# Altium PCB PCB.PcbDoc (part 3 of 3)
Units mil, origin at the board's own origin, x right, y up, seen from the top; angles counter-clockwise.
Board outline 8690 x 2710 mil, 2 copper layers (Top Layer, Bottom Layer); 78 components, 139 nets, 435 pads, 186 vias.
Unrouted connection lines stored in the file: 1.
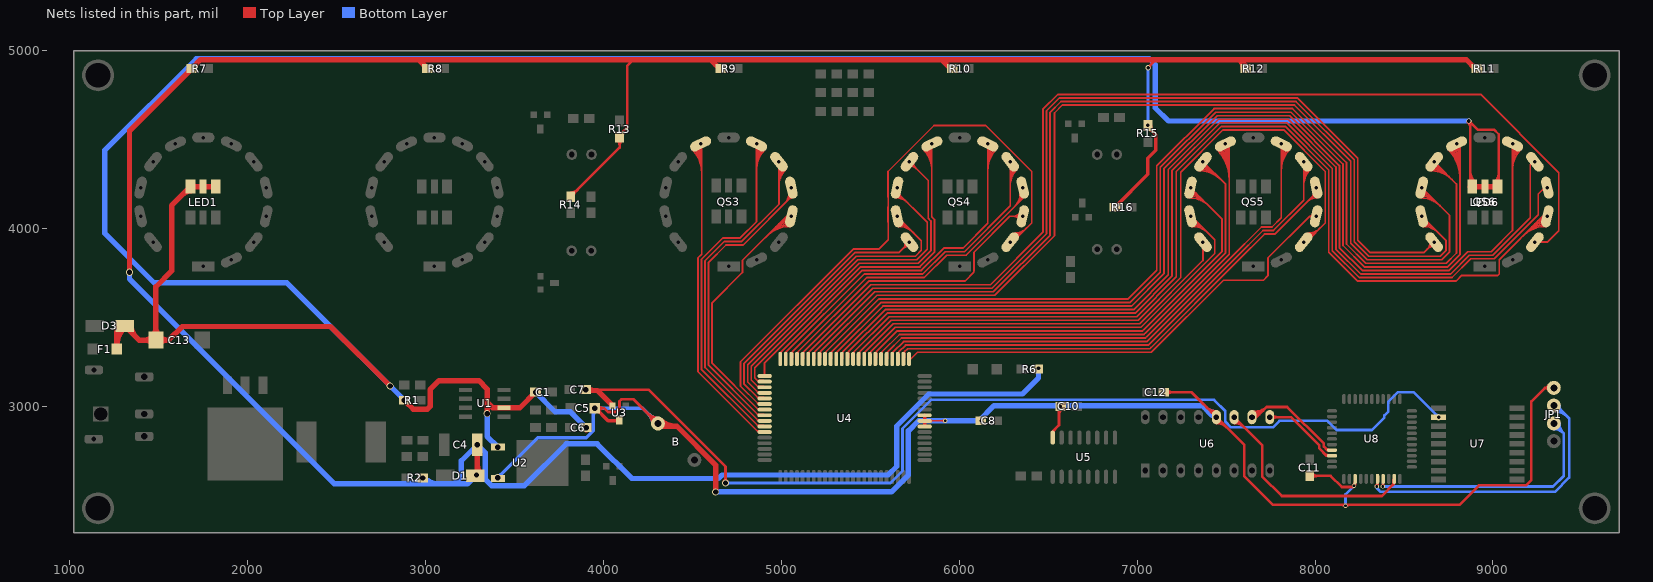
[diagram p3: the nets of this part, all layers, seen from the top]

## Via types
v1: diameter 24, hole 15, Top Layer to Bottom Layer, 111 vias
v2: diameter 40, hole 22, Top Layer to Bottom Layer, 33 vias
v3: diameter 40, hole 30, Top Layer to Bottom Layer, 28 vias
v4: diameter 30, hole 20, Top Layer to Bottom Layer, 10 vias
v5: diameter 35, hole 20, Top Layer to Bottom Layer, 3 vias
v6: diameter 40, hole 20, Top Layer to Bottom Layer, 1 vias

## Nets (pads, with @x,y where several pads share a name; then routed paths per layer and width w, separated by ;. In a path a pad name is that pad's centre, name@x,y a point inside that pad or via, vN(x,y) a via of type N, cw(c..) or ccw(c..) an arc to the next point about the centre after c; other vN are vias at no path point) (continued)
QS3-5: QS3.9 U4.75 | length 2422.7
  Top Layer w10: QS3.9@4497.73,4445.01 cw(c4368.37,4315.65) 4551.31,4315.65 ; QS3.9@4504.8,4452.08 cw(c4392.51,4339.8) 4551.31,4339.8 ; QS3.9@4511.87,4459.15 cw(c4416.65,4363.94) 4551.31,4363.94 ; QS3.9@4518.94,4466.22 cw(c4440.8,4388.08) 4551.31,4388.08 ; QS3.9@4526.01,4473.29 cw(c4464.94,4412.22) 4551.31,4412.22 ; QS3.9@4533.08,4480.37 cw(c4489.08,4436.37) 4551.31,4436.37 ; QS3.9@4540.15,4487.44 cw(c4513.22,4460.51) QS3.9@4551.31,4460.51 ; QS3.9@4545.6,4476.34 4551.31,4470.63 4551.31,3856.16 4530,3834.85 4530,3196.9 4864.97,2861.93 ; U4.75@4872.49,2861.14 cw(c4869.22,2866.17) 4864.97,2861.93 ; U4.75@4905.2,2856.26 4899.53,2861.93 4864.97,2861.93
QS3-6: QS3.7 U4.74 | length 2449.5
  Top Layer w10: 4859.91,4329.43 cw(c5023.37,4329.43) QS3.7@4907.79,4445.01 ; 4859.91,4353.57 cw(c4999.23,4353.57) QS3.7@4900.71,4452.08 ; 4859.91,4377.71 cw(c4975.08,4377.71) QS3.7@4893.64,4459.15 ; 4859.91,4401.85 cw(c4950.94,4401.85) QS3.7@4886.57,4466.22 ; 4859.91,4426 cw(c4926.8,4426) QS3.7@4879.5,4473.29 ; QS3.7@4859.91,4450.14 cw(c4902.66,4450.14) QS3.7@4872.43,4480.37 ; QS3.7@4859.91,4474.28 cw(c4878.52,4474.28) QS3.7@4865.36,4487.44 ; QS3.7@4859.91,4476.34 4859.91,4039.91 4767.95,3947.95 4671.38,3947.95 4550,3826.57 4550,3208.4 4864.97,2893.43 ; U4.74@4872.49,2892.64 cw(c4869.22,2897.67) 4864.97,2893.43 ; U4.74@4905.2,2887.76 4899.53,2893.43 4864.97,2893.43
QS3-7: QS3.6 U4.73 | length 2147
  Top Layer w10: U4.73@4872.49,2924.14 cw(c4869.22,2929.16) 4864.97,2924.92 ; U4.73@4905.2,2919.25 4899.53,2924.92 4864.97,2924.92 ; 4985.94,4240.33 cw(c5115.83,4240.33) QS3.6@5023.98,4332.18 ; 4985.94,4264.47 cw(c5091.69,4264.47) QS3.6@5016.91,4339.25 ; 4985.94,4288.62 cw(c5067.54,4288.62) QS3.6@5009.84,4346.32 ; 4985.94,4312.76 cw(c5043.4,4312.76) QS3.6@5002.77,4353.39 ; QS3.6@4985.94,4375.83 4985.94,4137.65 4776.23,3927.95 4679.66,3927.95 4570,3818.28 4570,3219.89 4864.97,2924.92
QS3-8: QS3.5 U4.72 | length 1826.2
  Top Layer w10: U4.72@4872.49,2955.63 cw(c4869.22,2960.66) 4864.97,2956.42 ; U4.72@4905.2,2950.75 4899.53,2956.42 4864.97,2956.42 ; 5018.99,4142.42 ccw(c4965.36,4196.05) QS3.5@5041.2,4196.05 ; 5036.06,4159.49 ccw(c4999.5,4196.05) QS3.5@5051.2,4196.05 ; 5040.38,4163.81 cw(c5063.76,4140.42) QS3.5@5063.76,4173.49 ; QS3.5@5055.88,4230.6 5070,4216.48 5070,4193.43 4784.52,3907.95 4687.95,3907.95 4590,3810 4590,3231.39 4864.97,2956.42
QS3-9: QS3.4 U4.71 | length 2056.6
  Top Layer w10: U4.71@4872.49,2987.13 cw(c4869.22,2992.16) 4864.97,2987.91 ; U4.71@4905.2,2982.24 4899.53,2987.91 4864.97,2987.91 ; 4917.3,3958.16 cw(c5047.99,3827.46) QS3.4@5047.99,4012.3 ; 4934.37,3975.23 cw(c5047.99,3861.6) QS3.4@5047.99,4022.3 ; 4951.44,3992.3 cw(c5047.99,3895.75) QS3.4@5047.99,4032.3 ; 4968.51,4009.37 cw(c5047.99,3929.89) QS3.4@5047.99,4042.3 ; 4985.58,4026.45 cw(c5047.99,3964.03) QS3.4@5047.99,4052.3 ; 5002.65,4043.52 cw(c5047.99,3998.17) QS3.4@5047.99,4062.3 ; 5019.72,4060.59 cw(c5047.99,4032.31) QS3.4@5047.99,4072.3 ; QS3.4@5055.88,4069.4 5028.54,4069.4 4780.75,3821.61 4780.75,3754.02 4610,3583.27 4610,3242.89 4864.97,2987.91
QS4-0: QS4.3 U4.70 | length 3480.7
  Top Layer w10: U4.70@4872.49,3018.62 cw(c4869.22,3023.65) 4864.97,3019.41 ; U4.70@4905.2,3013.74 4899.53,3019.41 4864.97,3019.41 ; QS4.3@6285.94,3924.17 6311.77,3950 6325.48,3950 6406.85,4031.37 6406.85,4321.34 6148.19,4580 5857.32,4580 5598.66,4321.34 5598.66,4176.8 5600,4175.46 5600,4124.54 5598.66,4123.2 5598.66,4035.38 5600,4034.04 5600,3938 5547,3885 5403.63,3885 4769.84,3251.21 4769.84,3114.54 4864.97,3019.41 ; QS4.3@6308.03,3954.43 ccw(c6308.03,4007.25) 6345.38,3969.9 ; QS4.3@6308.03,3964.43 ccw(c6308.03,4041.39) 6362.45,3986.97 ; QS4.3@6308.03,3974.43 ccw(c6308.03,4075.53) 6379.52,4004.04
QS4-1: QS4.13 U4.69 | length 1619
  Top Layer w10: U4.69@4872.49,3050.12 cw(c4869.22,3055.15) 4864.97,3050.91 ; U4.69@4905.2,3045.24 4899.53,3050.91 4864.97,3050.91 ; QS4.13@5697.01,3924.17 cw(c5642.55,3924.17) 5681.06,3885.66 cw(c5719.57,3847.15) QS4.13@5719.57,3901.61 ; QS4.13@5707.01,3924.17 cw(c5676.69,3924.17) 5698.13,3902.73 cw(c5719.57,3881.29) QS4.13@5719.57,3911.61 ; QS4.13@5719.57,3924.17 5660.4,3865 5411.91,3865 4789.84,3242.93 4789.84,3126.03 4864.97,3050.91
QS4-2: QS4.12 U4.68 | length 1976.3
  Top Layer w10: U4.68@4872.49,3081.62 cw(c4869.22,3086.65) 4864.97,3082.4 ; U4.68@4905.2,3076.73 4899.53,3082.4 4864.97,3082.4 ; QS4.12@5649.63,4069.4 5786.31,3932.73 5786.31,3877.97 5753.33,3845 5420.2,3845 4809.84,3234.64 4809.84,3137.53 4864.97,3082.4 ; QS4.12@5657.52,4012.3 cw(c5657.52,3893.47) 5741.54,3977.5 ; QS4.12@5657.52,4022.3 cw(c5657.52,3927.61) 5724.47,3994.57 ; QS4.12@5657.52,4032.3 cw(c5657.52,3961.76) 5707.4,4011.64 ; QS4.12@5657.52,4042.3 cw(c5657.52,3995.9) 5690.33,4028.71
QS4-3: QS4.11 U4.67 | length 2036.4
  Top Layer w10: U4.67@4872.49,3113.11 cw(c4869.22,3118.14) 4864.97,3113.9 ; U4.67@4905.2,3108.23 4899.53,3113.9 4864.97,3113.9 ; QS4.11@5641.75,4173.49 cw(c5641.75,4078.08) 5709.21,4145.55 ; QS4.11@5641.75,4183.49 cw(c5641.75,4112.23) 5692.14,4162.62 ; QS4.11@5641.75,4193.49 cw(c5641.75,4146.37) 5675.07,4179.69 ; QS4.11@5649.63,4230.6 5649.63,4205.13 5820,4034.76 5820,3883.38 5761.62,3825 5428.48,3825 4829.84,3226.36 4829.84,3149.03 4864.97,3113.9 ; QS4.11@5664.31,4196.05 ccw(c5677.82,4196.05) 5668.26,4186.5
QS4-4: QS4.10 U4.66 | length 2075.8
  Top Layer w10: U4.66@4872.49,3144.61 cw(c4869.22,3149.64) 4864.97,3145.39 ; U4.66@4905.2,3139.72 4899.53,3145.39 4864.97,3145.39 ; QS4.10@5719.57,4353.27 cw(c5719.57,4298.81) 5758.08,4337.32 cw(c5796.59,4375.83) QS4.10@5742.13,4375.83 ; QS4.10@5719.57,4363.27 cw(c5719.57,4332.95) 5741.01,4354.39 cw(c5762.45,4375.83) QS4.10@5732.13,4375.83 ; QS4.10@5719.57,4375.83 5824.76,4270.64 5824.76,4058.28 5840,4043.05 5840,3875.1 5769.9,3805 5436.77,3805 4849.84,3218.08 4849.84,3160.52 4864.97,3145.39
QS4-5: QS4.9 U4.65 | length 2409.3
  Top Layer w10: U4.65@4901.08,3175.34 ccw(c4891.13,3185.29) 4905.2,3185.29 ccw(c4919.26,3185.29) U4.65@4909.32,3175.34 ; U4.65@4905.2,3171.22 4905.2,3245.15 5445.05,3785 5778.18,3785 5860,3866.82 5860,4051.33 5844.76,4066.57 5844.76,4475.5 QS4.9@5845.6,4476.34 ; QS4.9@5797.73,4445.01 cw(c5684.17,4331.45) 5844.76,4331.45 ; QS4.9@5804.8,4452.08 cw(c5708.31,4355.59) 5844.76,4355.59 ; QS4.9@5811.87,4459.15 cw(c5732.45,4379.73) 5844.76,4379.73 ; QS4.9@5818.94,4466.22 cw(c5756.59,4403.88) 5844.76,4403.88 ; QS4.9@5826.01,4473.29 cw(c5780.74,4428.02) 5844.76,4428.02 ; QS4.9@5833.08,4480.37 cw(c5804.88,4452.16) QS4.9@5844.76,4452.16 ; QS4.9@5840.15,4487.44 cw(c5829.02,4476.3) QS4.9@5844.76,4476.3
QS4-6: QS4.7 U4.64 | length 2451.4
  Top Layer w10: U4.64@4992.8,3266.69 4992.8,3302.8 5455,3765 5786.47,3765 5911.82,3890.35 6020.5,3890.35 6159.91,4029.76 QS4.7@6159.91,4476.34 ; 6159.91,4329.43 cw(c6323.37,4329.43) QS4.7@6207.79,4445.01 ; 6159.91,4353.57 cw(c6299.23,4353.57) QS4.7@6200.71,4452.08 ; 6159.91,4377.71 cw(c6275.08,4377.71) QS4.7@6193.64,4459.15 ; 6159.91,4401.85 cw(c6250.94,4401.85) QS4.7@6186.57,4466.22 ; 6159.91,4426 cw(c6226.8,4426) QS4.7@6179.5,4473.29 ; QS4.7@6159.91,4450.14 cw(c6202.66,4450.14) QS4.7@6172.43,4480.37 ; QS4.7@6159.91,4474.28 cw(c6178.52,4474.28) QS4.7@6165.36,4487.44
QS4-7: QS4.6 U4.63 | length 2182.8
  Top Layer w10: U4.63@5024.29,3266.69 5024.29,3304.29 5465,3745 5794.75,3745 5920.11,3870.35 6028.79,3870.35 6285.94,4127.51 QS4.6@6285.94,4375.83 ; 6285.94,4240.33 cw(c6415.83,4240.33) QS4.6@6323.98,4332.18 ; 6285.94,4264.47 cw(c6391.69,4264.47) QS4.6@6316.91,4339.25 ; 6285.94,4288.62 cw(c6367.54,4288.62) QS4.6@6309.84,4346.32 ; 6285.94,4312.76 cw(c6343.4,4312.76) QS4.6@6302.77,4353.39
QS4-8: QS4.5 U4.62 | length 1955.4
  Top Layer w10: U4.62@5055.79,3266.69 5061.46,3272.36 5061.46,3306.92 ; U4.62@5060.67,3299.4 cw(c5065.7,3302.67) 5061.46,3306.92 ; 6311.81,4125.1 ccw(c6240.86,4196.05) QS4.5@6341.2,4196.05 ; 6328.89,4142.17 ccw(c6275,4196.05) QS4.5@6351.2,4196.05 ; 6345.96,4159.24 ccw(c6309.14,4196.05) QS4.5@6361.2,4196.05 ; QS4.5@6350.92,4177.51 cw(c6344.35,4168.03) 6355.88,4168.03 ; QS4.5@6355.88,4230.6 6355.88,4169.16 6038.68,3851.97 6038.68,3850.4 6038.64,3850.35 5928.39,3850.35 5803.04,3725 5479.54,3725 5061.46,3306.92
QS4-9: QS4.4 U4.61 | length 1828.1
  Top Layer w10: U4.61@5087.28,3266.69 5092.95,3272.36 5092.95,3306.92 ; U4.61@5092.17,3299.4 cw(c5097.2,3302.67) 5092.95,3306.92 ; QS4.4@6339.93,4053.45 ccw(c6301.42,4014.94) 6301.42,4069.4 ccw(c6301.42,4123.86) QS4.4@6339.93,4085.35 ; QS4.4@6347,4060.52 ccw(c6325.56,4039.08) 6325.56,4069.4 ccw(c6325.56,4099.72) QS4.4@6347,4078.28 ; QS4.4@6355.88,4069.4 6284.4,4069.4 6082.5,3867.5 6082.5,3760 6080.75,3758.25 6080.75,3754.02 6031.73,3705 5491.03,3705 5092.95,3306.92
QS5-0: QS5.3 U4.50 | length 4251.8
  Top Layer w10: U4.50@5433.74,3266.69 5439.41,3272.36 5439.41,3306.92 ; U4.50@5438.62,3299.4 cw(c5443.65,3302.67) 5439.41,3306.92 ; QS5.3@7949.65,3924.17 8056.85,4031.37 8056.85,4321.34 7823.43,4554.76 7482.08,4554.76 7245,4317.68 7245,3725.15 7004.85,3485 5617.49,3485 5439.41,3306.92 ; QS5.3@7958.03,3954.43 ccw(c7958.03,4007.25) 7995.38,3969.9 ; QS5.3@7958.03,3964.43 ccw(c7958.03,4041.39) 8012.45,3986.97 ; QS5.3@7958.03,3974.43 ccw(c7958.03,4075.53) 8029.52,4004.04
QS5-1: QS5.13 U4.49 | length 2271.3
  Top Layer w10: U4.49@5465.24,3266.69 5470.91,3272.36 5470.91,3306.92 ; U4.49@5470.12,3299.4 cw(c5475.15,3302.67) 5470.91,3306.92 ; QS5.13@7365.32,3928.43 QS5.13@7369.57,3924.17 7369.57,3821.44 7013.14,3465 5628.99,3465 5470.91,3306.92
QS5-2: QS5.12 U4.48 | length 2779
  Top Layer w10: U4.48@5496.73,3266.69 5502.4,3272.36 5502.4,3306.92 ; U4.48@5501.62,3299.4 cw(c5506.65,3302.67) 5502.4,3306.92 ; QS5.12@7299.63,4069.4 7304.49,4069.4 7436.31,3937.58 7436.31,3859.89 7021.42,3445 5640.48,3445 5502.4,3306.92 ; QS5.12@7307.52,4012.3 cw(c7307.52,3881.75) 7399.83,3974.06 ; QS5.12@7307.52,4022.3 cw(c7307.52,3915.9) 7382.75,3991.13 ; QS5.12@7307.52,4032.3 cw(c7307.52,3950.04) 7365.68,4008.21 ; QS5.12@7307.52,4042.3 cw(c7307.52,3984.18) 7348.61,4025.28
QS5-3: QS5.11 U4.47 | length 3124.5
  Top Layer w10: U4.47@5528.23,3266.69 5533.9,3272.36 5533.9,3306.92 ; U4.47@5533.11,3299.4 cw(c5538.14,3302.67) 5533.9,3306.92 ; QS5.11@7291.75,4173.49 cw(c7291.75,4016.6) 7402.69,4127.54 ; QS5.11@7291.75,4183.49 cw(c7291.75,4050.74) 7385.62,4144.61 ; QS5.11@7291.75,4193.49 cw(c7291.75,4084.88) 7368.55,4161.68 ; QS5.11@7291.75,4203.49 cw(c7291.75,4119.03) 7351.48,4178.75 ; QS5.11@7291.75,4213.49 cw(c7291.75,4153.17) 7334.41,4195.83 ; QS5.11@7291.75,4223.49 cw(c7291.75,4187.31) QS5.11@7317.33,4212.9 ; QS5.11@7291.75,4233.49 cw(c7291.75,4221.45) QS5.11@7300.26,4229.97 ; QS5.11@7299.63,4230.6 7477,4053.23 7477,3872.29 7454.76,3850.06 7454.76,3849.62 7036.97,3431.82 7036.53,3431.82 7029.71,3425 5651.98,3425 5533.9,3306.92
QS5-4: QS5.10 U4.46 | length 3340.1
  Top Layer w10: U4.46@5559.72,3266.69 5565.39,3272.36 5565.39,3306.92 ; U4.46@5564.61,3299.4 cw(c5569.64,3302.67) 5565.39,3306.92 ; QS5.10@7347.48,4325.57 cw(c7347.48,4150.89) 7471,4274.41 ; QS5.10@7347.48,4335.57 cw(c7347.48,4185.03) 7453.93,4291.48 ; QS5.10@7347.48,4345.57 cw(c7347.48,4219.18) 7436.85,4308.55 ; QS5.10@7347.48,4355.57 cw(c7347.48,4253.32) 7419.78,4325.62 ; QS5.10@7347.48,4365.57 cw(c7347.48,4287.46) 7402.71,4342.69 ; QS5.10@7347.48,4375.57 cw(c7347.48,4321.6) QS5.10@7385.64,4359.76 ; QS5.10@7347.48,4385.57 cw(c7347.48,4355.74) QS5.10@7368.57,4376.83 ; QS5.10@7369.57,4375.83 7497,4248.4 7497,3864.01 7474.76,3841.77 7474.76,3841.33 7045.26,3411.82 7044.81,3411.82 7037.99,3405 5663.48,3405 5565.39,3306.92
QS5-5: QS5.9 U4.45 | length 3806.2
  Top Layer w10: U4.45@5591.22,3266.69 5596.89,3272.36 5596.89,3306.92 ; U4.45@5596.1,3299.4 cw(c5601.13,3302.67) 5596.89,3306.92 ; QS5.9@7447.73,4445.01 cw(c7280.48,4277.77) 7517,4277.77 ; QS5.9@7454.8,4452.08 cw(c7304.63,4301.91) 7517,4301.91 ; QS5.9@7461.87,4459.15 cw(c7328.77,4326.05) 7517,4326.05 ; QS5.9@7468.94,4466.22 cw(c7352.91,4350.19) 7517,4350.19 ; QS5.9@7476.01,4473.29 cw(c7377.05,4374.34) 7517,4374.34 ; QS5.9@7483.08,4480.37 cw(c7401.19,4398.48) 7517,4398.48 ; QS5.9@7490.15,4487.44 cw(c7425.34,4422.62) 7517,4422.62 ; QS5.9@7495.6,4476.34 7517,4454.94 ; QS5.9@7497.22,4494.51 cw(c7449.48,4446.76) 7517,4446.76 ; QS5.9@7506.33,4456.49 cw(c7510.62,4448.56) 7517,4454.94 ; QS5.9@7515.44,4465.6 ccw(c7523.37,4461.31) 7517,4454.94 ; 5596.89,3306.92 5674.97,3385 7046.27,3385 7053.1,3391.82 7053.54,3391.82 7494.76,3833.05 7494.76,3833.49 7517,3855.73 7517,4454.94
QS5-6: QS5.7 U4.44 | length 3460.2
  Top Layer w10: U4.44@5622.72,3266.69 5628.39,3272.36 5628.39,3306.92 ; U4.44@5627.6,3299.4 cw(c5632.63,3302.67) 5628.39,3306.92 ; 7809.91,4329.43 cw(c7973.37,4329.43) QS5.7@7857.79,4445.01 ; 7809.91,4353.57 cw(c7949.23,4353.57) QS5.7@7850.71,4452.08 ; 7809.91,4377.71 cw(c7925.08,4377.71) QS5.7@7843.64,4459.15 ; 7809.91,4401.85 cw(c7900.94,4401.85) QS5.7@7836.57,4466.22 ; 7809.91,4426 cw(c7876.8,4426) QS5.7@7829.5,4473.29 ; QS5.7@7809.91,4450.14 cw(c7852.66,4450.14) QS5.7@7822.43,4480.37 ; QS5.7@7809.91,4474.28 cw(c7828.52,4474.28) QS5.7@7815.36,4487.44 ; QS5.7@7809.91,4476.34 7809.91,4061.81 7757.5,4009.4 7698.96,4009.4 7514.76,3825.21 7514.76,3824.76 7061.82,3371.82 7061.38,3371.82 7054.56,3365 5686.47,3365 5628.39,3306.92
QS5-7: QS5.6 U4.43 | length 3191.1
  Top Layer w10: U4.43@5654.21,3266.69 5659.88,3272.36 5659.88,3306.92 ; U4.43@5659.1,3299.4 cw(c5664.13,3302.67) 5659.88,3306.92 ; 7935.94,4240.33 cw(c8065.83,4240.33) QS5.6@7973.98,4332.18 ; 7935.94,4264.47 cw(c8041.69,4264.47) QS5.6@7966.91,4339.25 ; 7935.94,4288.62 cw(c8017.54,4288.62) QS5.6@7959.84,4346.32 ; 7935.94,4312.76 cw(c7993.4,4312.76) QS5.6@7952.77,4353.39 ; QS5.6@7935.94,4375.83 7935.94,4159.55 7765.79,3989.4 7707.24,3989.4 7548.14,3830.29 7548.14,3829.85 7541.28,3823 7540.84,3823 7534.76,3816.92 7534.76,3816.48 7070.11,3351.82 7069.67,3351.82 7062.84,3345 5697.96,3345 5659.88,3306.92
QS5-8: QS5.5 U4.42 | length 2929
  Top Layer w10: U4.42@5685.71,3266.69 5691.38,3272.36 5691.38,3306.92 ; U4.42@5690.59,3299.4 cw(c5695.62,3302.67) 5691.38,3306.92 ; 7952.99,4148.32 cw(c8013.76,4087.55) QS5.5@8013.76,4173.49 ; 7970.07,4165.39 cw(c8013.76,4121.7) QS5.5@8013.76,4183.49 ; 7984.47,4179.8 ccw(c7968.22,4196.05) QS5.5@7991.2,4196.05 ; 7987.14,4182.47 cw(c8013.76,4155.84) QS5.5@8013.76,4193.49 ; QS5.5@8005.88,4230.6 8005.88,4201.21 7774.07,3969.4 7715.53,3969.4 7568.14,3822.01 7568.14,3821.57 7078.39,3331.82 7077.95,3331.82 7071.13,3325 5709.46,3325 5691.38,3306.92
QS5-9: QS5.4 U4.41 | length 2720.1
  Top Layer w10: U4.41@5720,3260 5765,3305 7080,3305 7485,3710 7710,3710 7734.83,3734.83 7734.83,3834.83 7969.4,4069.4 ; QS5.4@7985.7,4059.33 ccw(c7969.4,4051.19) 7969.4,4069.4 ; QS5.4@7985.7,4079.48 cw(c7969.4,4087.61) 7969.4,4069.4 ; QS5.4@8005.88,4069.4 7969.4,4069.4
QS6-0: QS6.3 U4.60 | length 5969.8
  Top Layer w10: U4.60@5118.78,3266.69 5124.45,3272.36 5124.45,3306.92 ; U4.60@5123.66,3299.4 cw(c5128.69,3302.67) 5124.45,3306.92 ; QS6.3@9235.94,3924.17 9305.83,3924.17 9370,3988.34 9370,4315 8930.24,4754.76 6554.76,4754.76 6470,4670 6470,3979.85 6175.15,3685 5502.53,3685 5124.45,3306.92
QS6-1: QS6.13 U4.59 | length 5336.8
  Top Layer w10: U4.59@5155.16,3299.4 cw(c5160.19,3302.67) 5155.94,3306.92 ; U4.59@5155.94,3275 5155.94,3306.92 ; QS6.13@8647.01,3924.17 cw(c8592.55,3924.17) 8631.06,3885.66 cw(c8669.57,3847.15) QS6.13@8669.57,3901.61 ; QS6.13@8657.01,3924.17 cw(c8626.69,3924.17) 8648.13,3902.73 cw(c8669.57,3881.29) QS6.13@8669.57,3911.61 ; QS6.13@8669.57,3924.17 8610.4,3865 8310,3865 8240,3935 8240,4395 7900.24,4734.76 6563.05,4734.76 6490,4661.72 6490,3971.57 6183.43,3665 5514.03,3665 5155.94,3306.92
QS6-2: QS6.12 U4.58 | length 5738
  Top Layer w10: U4.58@5181.77,3266.69 5187.44,3272.36 5187.44,3306.92 ; U4.58@5186.65,3299.4 cw(c5191.68,3302.67) 5187.44,3306.92 ; QS6.12@8599.63,4069.4 8736.31,3932.73 8736.31,3877.97 8703.33,3845 8301.72,3845 8220,3926.72 8220,4386.72 7891.95,4714.76 6571.33,4714.76 6510,4653.43 6510,3963.28 6191.72,3645 5525.52,3645 5187.44,3306.92 ; QS6.12@8607.52,4012.3 cw(c8607.52,3893.47) 8691.54,3977.5 ; QS6.12@8607.52,4022.3 cw(c8607.52,3927.61) 8674.47,3994.57 ; QS6.12@8607.52,4032.3 cw(c8607.52,3961.76) 8657.4,4011.64 ; QS6.12@8607.52,4042.3 cw(c8607.52,3995.9) 8640.33,4028.71
QS6-3: QS6.11 U4.57 | length 6105.7
  Top Layer w10: U4.57@5213.27,3266.69 5218.94,3272.36 5218.94,3306.92 ; U4.57@5218.15,3299.4 cw(c5223.18,3302.67) 5218.94,3306.92 ; QS6.11@8591.75,4173.49 cw(c8591.75,4016.6) 8702.69,4127.54 ; QS6.11@8591.75,4183.49 cw(c8591.75,4050.74) 8685.62,4144.61 ; QS6.11@8591.75,4193.49 cw(c8591.75,4084.88) 8668.55,4161.68 ; QS6.11@8591.75,4203.49 cw(c8591.75,4119.03) 8651.48,4178.75 ; QS6.11@8591.75,4213.49 cw(c8591.75,4153.17) 8634.41,4195.83 ; QS6.11@8591.75,4223.49 cw(c8591.75,4187.31) QS6.11@8617.33,4212.9 ; QS6.11@8591.75,4233.49 cw(c8591.75,4221.45) QS6.11@8600.26,4229.97 ; QS6.11@8599.63,4230.6 8756.31,4073.92 8756.31,3869.69 8711.62,3825 8293.43,3825 8200,3918.43 8200,4378.43 7883.67,4694.76 6579.62,4694.76 6535,4650.15 6535,3960 6200,3625 5537.02,3625 5218.94,3306.92
QS6-4: QS6.10 U4.56 | length 6285.3
  Top Layer w10: U4.56@5244.76,3266.69 5250.43,3272.36 5250.43,3306.92 ; U4.56@5249.65,3299.4 cw(c5254.68,3302.67) 5250.43,3306.92 ; QS6.10@8647.48,4325.57 cw(c8647.48,4150.89) 8771,4274.41 ; QS6.10@8647.48,4335.57 cw(c8647.48,4185.03) 8753.93,4291.48 ; QS6.10@8647.48,4345.57 cw(c8647.48,4219.18) 8736.85,4308.55 ; QS6.10@8647.48,4355.57 cw(c8647.48,4253.32) 8719.78,4325.62 ; QS6.10@8647.48,4365.57 cw(c8647.48,4287.46) 8702.71,4342.69 ; QS6.10@8647.48,4375.57 cw(c8647.48,4321.6) QS6.10@8685.64,4359.76 ; QS6.10@8647.48,4385.57 cw(c8647.48,4355.74) QS6.10@8668.57,4376.83 ; QS6.10@8669.57,4375.83 8795,4250.4 8795,3863.14 8736.86,3805 8285.15,3805 8176.85,3913.3 8176.85,4371.04 7873.13,4674.76 7432.38,4674.76 7110,4352.38 7110,3765 6950,3605 5548.52,3605 5250.43,3306.92
QS6-5: QS6.9 U4.55 | length 6686.3
  Top Layer w10: U4.55@5276.26,3266.69 5281.93,3272.36 5281.93,3306.92 ; U4.55@5281.14,3299.4 cw(c5286.17,3302.67) 5281.93,3306.92 ; QS6.9@8747.73,4445.01 cw(c8585.31,4282.6) 8815,4282.6 ; QS6.9@8754.8,4452.08 cw(c8609.45,4306.74) 8815,4306.74 ; QS6.9@8761.87,4459.15 cw(c8633.6,4330.88) 8815,4330.88 ; QS6.9@8768.94,4466.22 cw(c8657.74,4355.02) 8815,4355.02 ; QS6.9@8776.01,4473.29 cw(c8681.88,4379.16) 8815,4379.16 ; QS6.9@8783.08,4480.37 cw(c8706.02,4403.31) 8815,4403.31 ; QS6.9@8790.15,4487.44 cw(c8730.16,4427.45) 8815,4427.45 ; QS6.9@8795.6,4476.34 8815,4456.94 8815,3854.85 8745.15,3785 8276.86,3785 8156.85,3905.01 8156.85,4362.76 7864.85,4654.76 7440.66,4654.76 7130,4344.1 7130,3755 6960,3585 5560.01,3585 5281.93,3306.92 ; QS6.9@8797.22,4494.51 cw(c8754.31,4451.59) 8815,4451.59
QS6-6: QS6.7 U4.54 | length 6453
  Top Layer w10: U4.54@5307.76,3266.69 5313.43,3272.36 5313.43,3306.92 5571.51,3565 6968.28,3565 7150,3746.72 7150,4335.82 7448.95,4634.76 7856.56,4634.76 8136.85,4354.48 8136.85,3893 8264.85,3765 8753.43,3765 8858.79,3870.35 8990.35,3870.35 9109.91,3989.91 QS6.7@9109.91,4476.34 ; U4.54@5312.64,3299.4 cw(c5317.67,3302.67) 5313.42,3306.92 ; 9109.91,4329.43 cw(c9273.37,4329.43) QS6.7@9157.79,4445.01 ; 9109.91,4353.57 cw(c9249.23,4353.57) QS6.7@9150.71,4452.08 ; 9109.91,4377.71 cw(c9225.08,4377.71) QS6.7@9143.64,4459.15 ; 9109.91,4401.85 cw(c9200.94,4401.85) QS6.7@9136.57,4466.22 ; 9109.91,4426 cw(c9176.8,4426) QS6.7@9129.5,4473.29 ; QS6.7@9109.91,4450.14 cw(c9152.66,4450.14) QS6.7@9122.43,4480.37 ; QS6.7@9109.91,4474.28 cw(c9128.52,4474.28) QS6.7@9115.36,4487.44
QS6-7: QS6.6 U4.53 | length 5910.2
  Top Layer w10: U4.53@5339.25,3266.69 5344.92,3272.36 5344.92,3306.92 ; U4.53@5344.14,3299.4 cw(c5349.17,3302.67) 5344.92,3306.92 ; QS6.6@9213.73,4371.87 cw(c9200.49,4369.51) 9210,4360 ; QS6.6@9235.94,4375.83 9234.91,4374.8 9224.8,4374.8 9210,4360 ; 5344.92,3306.92 5583,3545 6980,3545 7175,3740 7175,4332.53 7457.23,4614.76 7848.28,4614.76 8116.85,4346.19 8116.85,3884.72 8256.57,3745 8761.72,3745 8867.07,3850.35 8998.64,3850.35 9210,4061.72 9210,4360
QS6-8: QS6.5 U4.52 | length 5769.1
  Top Layer w10: U4.52@5370.75,3266.69 5376.42,3272.36 5376.42,3306.92 ; U4.52@5375.63,3299.4 cw(c5380.66,3302.67) 5376.42,3306.92 ; QS6.5@9305.88,4230.6 9290.6,4230.6 9254.91,4194.91 9254.91,4078.34 9006.92,3830.35 8875.35,3830.35 8770,3725 8248.28,3725 8096.85,3876.43 8096.85,4337.91 7840,4594.76 7465.52,4594.76 7195,4324.25 7195,3731.72 6988.28,3525 5594.5,3525 5376.42,3306.92
QS6-9: QS6.4 U4.51 | length 6267.9
  Top Layer w10: U4.51@5402.24,3266.69 5407.91,3272.36 5407.91,3306.92 ; U4.51@5407.13,3299.4 cw(c5412.16,3302.67) 5407.91,3306.92 ; 9167.3,3958.16 cw(c9297.99,3827.46) QS6.4@9297.99,4012.3 ; 9184.37,3975.23 cw(c9297.99,3861.6) QS6.4@9297.99,4022.3 ; 9201.44,3992.3 cw(c9297.99,3895.75) QS6.4@9297.99,4032.3 ; 9218.51,4009.37 cw(c9297.99,3929.89) QS6.4@9297.99,4042.3 ; 9235.58,4026.45 cw(c9297.99,3964.03) QS6.4@9297.99,4052.3 ; 9252.65,4043.52 cw(c9297.99,3998.17) QS6.4@9297.99,4062.3 ; 9269.72,4060.59 cw(c9297.99,4032.31) QS6.4@9297.99,4072.3 ; QS6.4@9305.88,4069.4 9278.54,4069.4 9034.83,3825.7 9034.83,3744.83 9027,3737 8824,3737 8792,3705 8240,3705 8076.85,3868.15 8076.85,4329.62 7831.71,4574.76 7473.8,4574.76 7220,4320.96 7220,3728.43 6996.57,3505 5606,3505 5407.91,3306.92
RTC_INT: U6.11 U8.21 | length 1377.4
  Top Layer w15: U6.11@7545,2907.5 cw(c7545,2829.04) 7600.48,2884.52 ; U6.11@7545,2922.5 cw(c7545,2880.25) 7574.87,2910.13 ; U6.11@7545,2940 7702.5,2782.5 7702.5,2607.4 7812.83,2497.07 8375.22,2497.07 8441.24,2563.08 ; 8436.32,2558.17 ccw(c8420.08,2574.41) U8.21@8443.05,2574.41 ; 8441.24,2562.35 cw(c8453.35,2562.35) U8.21@8446.68,2572.45 ; U8.21@8443.24,2573.49 cw(c8434.56,2569.76) 8441.24,2563.08 ; U8.21@8445.39,2593.11 8441.24,2588.96 8441.24,2563.08
RTC_SCL: U6.10 U8.8 | length 831.3
  Top Layer w15: U6.10@7640.35,2927.9 ccw(c7645.28,2956.66) U6.10@7665.92,2936.02 ; U6.10@7642.89,2942.68 ccw(c7651.28,2991.64) 7686.41,2956.51 ; U6.10@7645,2940 7669.9,2940 7727.4,2997.5 ; U6.10@7645.42,2957.46 ccw(c7657.29,3026.62) 7706.9,2977.01 ; U6.10@7647.96,2972.25 ccw(c7663.29,3061.61) 7727.39,2997.5 ; 8060.06,2763.6 ccw(c8076.3,2779.84) U8.8@8076.3,2756.87 ; U8.8@8095,2754.53 8069.13,2754.53 8048.96,2774.7 8048.96,2791.4 7842.86,2997.5 7727.4,2997.5
RTC_SDA: U6.9 U8.9 | length 541.4
  Top Layer w15: U6.9@7745,2940 7865,2940 8023.96,2781.04 8023.96,2764.34 8065.27,2723.03 U8.9@8095,2723.03 ; U6.9@7757.37,2927.63 cw(c7787.25,2897.75) 7787.25,2940 cw(c7787.25,2982.25) U6.9@7757.37,2952.37 ; 8053.47,2734.83 ccw(c8076.3,2757.66) U8.9@8076.3,2725.37
RX: JP1.2 U8.18 | length 1853.6
  Top Layer w15: v1@8342.82,2553.18 ccw(c8324.27,2571.73) U8.18@8350.5,2571.73 ; v1(8346,2550) 8350,2550 8350.5,2550.5 8350.5,2592.7 U8.18@8350.91,2593.11
  Bottom Layer w15: v1(8346,2550) 8346,2542.28 8367.78,2520.5 9348.5,2520.5 9428,2600 9428,2934 9357,3005 JP1.2@9342,3005 ; v1@8350.5,2550 ccw(c8380,2550) 8359.14,2529.14 ; JP1.2@9342,2973.13 cw(c9342,2859.98) 9422.01,2939.99 ; JP1.2@9342,2988.13 cw(c9342,2911.19) 9396.41,2965.59 ; JP1.2@9373.87,3005 ccw(c9414.6,3005) 9385.8,2976.2
TX: JP1.3 U8.19 | length 1605.7
  Top Layer w15: v1@8376.82,2553.18 ccw(c8363.34,2566.66) U8.19@8382.4,2566.66 ; v1(8380,2550) 8382.4,2552.4 U8.19@8382.4,2593.11
  Bottom Layer w15: v1(8380,2550) 9338,2550 9398,2610 9398,2670 9398.87,2670.87 9398.87,2848.13 JP1.3@9342,2905 ; JP1.3@9342,2873.13 cw(c9342,2796.19) 9396.41,2850.59 cw(c9450.81,2905) JP1.3@9373.87,2905 ; JP1.3@9342,2888.13 cw(c9342,2847.4) 9370.8,2876.2 cw(c9399.6,2905) JP1.3@9358.87,2905
VCC: B.1 C5.1 C8.2 C10.2 C11.1 C12.1 JP1.1 U2.2 U3.3 U4.31 U4.32 U4.33 U5.16 U6.12 U8.14 | length 10846.5
  Top Layer w10: U4.32@5838.45,2915.13 cw(c5850.2,2903.38) 5850.2,2920 ; U4.32@5838.45,2923.37 ccw(c5846.59,2931.51) 5846.59,2920 ; U4.32@5840.55,2920 v1(5920,2920) ; v1@5915.05,2915.05 ccw(c5903.1,2903.1) 5903.1,2920 ccw(c5903.1,2936.9) v1@5915.05,2924.95
  Top Layer w15: v3(3950,2990) 3955,2990 4004.25,2990 ; C5.1@3958.84,2981.16 cw(c3980.18,2959.82) 3980.18,2990 cw(c3980.18,3020.18) C5.1@3958.84,2998.84 ; C5.1@3965.92,2974.1 cw(c4004.25,2935.85) 4004.25,2990 ; C5.1@3965.92,3005.9 ccw(c4004.25,3044.15) 4004.25,2990 ; B.1@4273.67,2904.46 ccw(c4196.72,2904.46) 4251.13,2958.87 ccw(c4305.54,3013.28) B.1@4305.54,2936.33 ; B.1@4288.67,2904.46 ccw(c4247.94,2904.46) 4276.74,2933.26 ccw(c4305.54,2962.06) B.1@4305.54,2921.33 ; B.1@4321,2889 4169.5,3040.5 4099.75,3040.5 4089.5,3030.25 4089.5,2983.75 4075.25,2969.5 4024.75,2969.5 4004.25,2990 ; U5.16@6525,2825 6525,2860 6560,2895 C10.2@6560,2980 ; U5.16@6529.5,2853 cw(c6557.26,2853) 6537.63,2872.63 ; C10.2@6552.63,2987.63 cw(c6534.82,2969.82) 6560,2969.82 ; 6560,2945.68 cw(c6619.32,2945.68) C10.2@6577.37,2987.63 ; C10.2@6565.6,2999.05 cw(c6545.34,2994.66) C10.2@6560,2980 ; C10.2@6570,2990 C10.2@6560,2980 ; C12.1@7149.75,3080 7305,3080 U6.12@7445,2940 7602.5,2782.5 7602.5,2607.4 7762.83,2447.07 v1@8171,2447.07 ; C12.1@7167.37,3067.63 cw(c7197.25,3037.75) 7197.25,3080 cw(c7197.25,3122.25) C12.1@7167.37,3092.37 ; 7389.52,2995.48 ccw(c7445,3050.96) U6.12@7445,2972.5 ; 7415.13,2969.87 ccw(c7445,2999.75) U6.12@7445,2957.5 ; U6.12@7445,2907.5 cw(c7445,2829.04) 7500.48,2884.52 ; U6.12@7445,2922.5 cw(c7445,2880.25) 7474.87,2910.13 ; C11.1@7970,2610 8087.67,2610 8150.6,2547.07 v1@8212.07,2547.07 ; C11.1@7982.37,2597.63 cw(c8012.25,2567.75) 8012.25,2610 cw(c8012.25,2652.25) C11.1@7982.37,2622.37 ; 8147.9,2447.07 cw(c8147.9,2418.9) v1@8167.82,2438.82 ; v1(8171,2442) v1@8171,2447.07 ; v1@8174.18,2438.82 cw(c8194.1,2418.9) 8194.1,2447.07 ; v1@8215.82,2557.18 ccw(c8193.84,2579.16) U8.14@8224.92,2579.16 ; U8.14@8222.58,2574.3 cw(c8186.58,2572.55) v1@8212.07,2547.07 ; U8.14@8224.92,2593.11 8224.92,2559.92 v1@8212.07,2547.07 ; JP1.1@9313.2,3091.34 ccw(c9291.62,3081.11) 9291.62,3105 ; JP1.1@9313.2,3118.66 cw(c9291.62,3128.89) 9291.62,3105 ; JP1.1@9342,3105 9291.61,3105 ; v1@8171,2447.07 8812.07,2447.07 8921.44,2556.44 9185.56,2556.44 9215.81,2586.69 9215.81,3029.19 9291.61,3105
  Top Layer w20: C5.1@3950,2980 cw(c3950,2943.79) C5.1@3975.61,2969.39 ; C5.1@3955,2990 4025,2920 4082,2920 U3.3@4087,2925 ; 4062.86,2920 cw(c4062.86,2893.86) U3.3@4081.34,2912.34 ; U4.31@5804.8,2887.76 U4.32@5804.8,2919.25 U4.33@5804.8,2950.75
  Top Layer w30: B.1@4321,2889 4412.03,2889 4630,2671.03 v3(4630,2519) ; B.1@4322.77,2921.7 ccw(c4401.7,3000.63) 4401.7,2889
  Bottom Layer w15: v1(8171,2442) 8171,2506 v1(8219,2554)
  Bottom Layer w20: v3(3405,2600) 3630,2825 3902.57,2825 3918.57,2841 3942,2864.43 3942,2982 v3(3950,2990) 4220,2990 B.1@4302,2908 ; v3@3405,2610 ccw(c3405,2634.14) 3422.07,2617.07 ccw(c3439.14,2600) v3@3415,2600 ; 3942,2946.54 cw(c3993.46,2946.54) 3957.07,2982.93 cw(c3974.14,2965.86) 3974.14,2990 cw(c3974.14,3014.14) v3@3957.07,2997.07 ; B.1@4276.17,2904.46 ccw(c4205.26,2904.46) 4255.4,2954.6 ccw(c4305.54,3004.74) B.1@4305.54,2933.83
  Bottom Layer w30: v3@4630,2520 5618,2520 5713,2615 5713,2863 5770,2920 v1(5920,2920) 6110,2920 6195,3005 7365.71,3005 7420.71,2950 7435,2950 U6.12@7445,2940 U6.12@7452.5,2932.5 ; v1@6117,2920 cw(c6133.9,2920) 6121.95,2931.95 ; 7377.93,2992.78 ccw(c7445,3059.85) U6.12@7445,2965
  other v1: 6120,2920 6570,3000
VCC3: C7.2 U3.2 U7.2 | length 6059.5
  Top Layer w15: v3(3900,3095) C7.2@3905,3090 ; 3960,3095 4251.99,3095 4685,2661.99 v3(4685,2570) ; v3@4676.16,2578.84 ccw(c4654.82,2600.18) 4685,2600.18 ccw(c4715.18,2600.18) v3@4693.84,2578.84
  Top Layer w30: C7.2@3903.54,3098.54 ccw(c3924.14,3119.14) C7.2@3924.14,3090 ; C7.2@3903.71,3091.65 cw(c3916.11,3080.44) C7.2@3924.47,3094.91 ; C7.2@3905,3090 3965,3090 U3.2@4050,3005 ; C7.2@3912.07,3102.07 ccw(c3941.21,3131.21) 3941.21,3090
  Bottom Layer w15: v3(4685,2570) 5613,2570 5680.5,2637.5 5680.5,2876.46 5841.54,3037.5 7432.5,3037.5 7495,2975 7495,2914.9 7527.4,2882.5 7762.6,2882.5 7799.1,2919 8069,2919 8120.5,2867.5 8319.22,2867.5 8389.5,2937.78 8389.5,2949.22 8411.55,2971.27 8411.55,3027.55 8465,3081 8552.74,3081 v5(8694.06,2939.68) ; v3@4693.84,2561.16 cw(c4715.18,2539.82) 4715.18,2570 cw(c4715.18,2600.18) v3@4693.84,2578.84 ; v5@8684.06,2939.68 ccw(c8659.91,2939.68) 8676.98,2956.76 ccw(c8694.06,2973.83) v5@8694.06,2949.68
VCC12: C1.2 C6.2 C13.1 D3.1 F1.2 LED1.0 LED1.1 LED1.2 LED6.0 LED6.1 LED6.2 R1.2 U1.6 U2.1 | length 17595.7
  Top Layer w14: v4@8859.34,4599.34 cw(c8826.94,4566.94) 8872.76,4566.94 ; v4@8865,4597 cw(c8865,4577.69) 8878.66,4591.34 cw(c8892.31,4605) v4@8873,4605 ; LED6.0@8872.76,4236 8872.76,4597.24 8913.24,4556.76 9006.65,4556.76 9032.75,4530.66 9032.75,4241.75 LED6.1@9029,4238 ; 8872.76,4290.77 ccw(c8926.96,4290.77) LED6.0@8888.64,4252.45 ; 8872.76,4324.57 ccw(c8960.76,4324.57) LED6.0@8898.54,4262.35 ; LED6.1@9011.19,4262.35 ccw(c8959.16,4314.38) 9032.75,4314.38 ; LED6.1@9021.09,4252.45 ccw(c8992.96,4280.58) 9032.75,4280.58 ; 9032.75,4280.51 ccw(c9058.43,4280.51) LED6.1@9040.27,4262.35
  Top Layer w30: F1.2@1252.39,3333.61 ccw(c1226.79,3359.21) 1263,3359.21 ccw(c1299.21,3359.21) F1.2@1273.61,3333.61 ; F1.2@1263,3323 1263,3407.71 ; F1.2@1263,3339.47 cw(c1404.1,3339.47) D3.1@1304.33,3439.25 ; 1263,3399.98 cw(c1296.96,3399.98) D3.1@1292.9,3433.69 ; 1263,3411.9 cw(c1331.67,3411.9) D3.1@1283.11,3460.46 ; D3.1@1272.15,3446.78 cw(c1236.1,3434.61) 1263,3407.71 ; D3.1@1345.46,3453 ccw(c1435.18,3453) 1371.74,3389.55 ; C13.1@1463.54,3353.54 ccw(c1416.56,3306.56) 1416.56,3373 ccw(c1416.56,3439.44) C13.1@1463.54,3392.46 ; C13.1@1463.54,3397.38 ccw(c1416.56,3444.36) 1483,3444.36 ccw(c1549.44,3444.36) C13.1@1502.46,3397.38 ; C13.1@1502.46,3353.54 cw(c1549.44,3306.56) 1549.44,3373 cw(c1549.44,3439.44) C13.1@1502.46,3392.46 ; 1636.8,4194.56 cw(c1678,4153.36) LED1.0@1678,4211.63 ; LED1.0@1686.88,4227.12 cw(c1708.32,4205.68) 1708.32,4236 cw(c1708.32,4266.32) LED1.0@1686.88,4244.88 ; LED1.1@1810.85,4227.12 ccw(c1789.41,4205.68) 1789.41,4236 ccw(c1789.41,4266.32) LED1.1@1810.85,4244.88 ; LED1.1@1819.73,4236 LED1.2@1748,4236 LED1.0@1678,4236 1678,4235.77 1571.5,4129.27 1571.5,3761.5 1483,3673 C13.1@1483,3373 ; v3@2797.5,3117.5 2465,3450 1631.44,3450 1554.44,3373 C13.1@1483,3373 ; v3(2880,3034.64) 2929.64,2985 3010.36,2985 3025,2999.64 3025,3095 3075,3145 3298.43,3145 3345,3098.43 3345,3025 ; R1.2@2895,3035 ccw(c2932.07,3035) 2905.86,3008.79 ; v3(3345,2960) 3345,3025 ; 3591.39,3055.39 ccw(c3565.79,3081) C1.2@3602,3081 ; v3(3617,3081) 3529,2993 U1.6@3439.5,2993 3377,2993 3345,3025 ; C6.2@3902,2868.08 v3(3902,2881) ; LED6.0@8872.76,4236 LED6.0@8884,4236 LED6.2@8954,4236 LED6.1@9025.73,4236 9027,4236 LED6.1@9029,4238 ; LED6.0@8892.88,4227.12 cw(c8914.32,4205.68) 8914.32,4236 cw(c8914.32,4266.32) LED6.0@8892.88,4244.88 ; LED6.1@9016.85,4227.12 ccw(c8995.41,4205.68) 8995.41,4236 ccw(c8995.41,4266.32) LED6.1@9016.85,4244.88 ; 1263,3407.71 D3.1@1308.29,3453 1388.29,3373 C13.1@1483,3373
  Bottom Layer w30: v3@2880,3035 2219.76,3695.24 1473.77,3695.24 1195.9,3973.1 1195.9,4439.1 1194.9,4440.1 1709.79,4955 7067.57,4955 7101,4921.57 7101,4679.5 7175.5,4605 v4(8865,4605) ; v3(3345,2960) 3345,2832.08 v3(3405.5,2771.58) ; v3(3617,3081) 3728,2970 3813,2970 v3(3902,2881)
  other v3: 2800,3115
VH: C4.1 D1.1 R2.1 R6.2 R7.2 R8.2 R9.2 R10.2 R11.2 R12.2 R13.1 R14.1 R15.1 R16.1 | length 18746.7
  Top Layer w15: R14.1@3815,4180 4090,4455 R13.1@4090,4515 4090,4525.25 4132.5,4567.75 4132.5,4915.5 4167,4950 ; R14.1@3815,4202.5 ccw(c3815,4256.82) 3853.41,4218.41 ; R14.1@3832.5,4185 cw(c3862.68,4185) 3841.34,4206.34 ; R13.1@4077.63,4497.63 cw(c4047.75,4467.75) 4090,4467.75 cw(c4132.25,4467.75) R13.1@4102.37,4497.63 ; R13.1@4090,4537.5 ccw(c4090,4567.07) 4110.91,4546.16 ; R13.1@4107.5,4520 cw(c4162.43,4520) 4123.59,4558.84 ; v4(7061,4905) 7103,4947 7103,4950 ; v4@7061,4912.5 ccw(c7061,4930.61) 7073.8,4917.8 ccw(c7086.61,4905) v4@7068.5,4905
  Top Layer w20: R16.1@6875,4120 7060,4305 7060,4395 7105,4440 7105,4528.28 7060,4573.28 v4(7060,4580) ; R16.1@6880,4135 ccw(c6880,4159.14) R16.1@6897.07,4142.07 ; R16.1@6895,4120 cw(c6943.28,4120) 6909.14,4154.14 ; R15.1@7058.7,4575.17 cw(c7050.51,4544.78) R15.1@7080.91,4552.93 ; R15.1@7060,4560 cw(c7060,4527.93) R15.1@7082.68,4550.61 ; R15.1@7065,4580 ccw(c7093.28,4580) R15.1@7073.28,4560 ; R15.1@7075,4575 ccw(c7115.36,4575) 7086.82,4546.46
  Top Layer w30: v3(1335,3755) 1335,4550 R7.2@1685,4900 1685,4900.36 1734.64,4950 2960,4950 ; 1659.39,4874.39 ccw(c1633.79,4900) R7.2@1670,4900 ; R7.2@1700,4900 cw(c1737.07,4900) 1710.86,4926.21 ; 2984.39,4925.61 cw(c2958.79,4900) R8.2@2995,4900 ; R8.2@3010,4900 2960,4950 ; D1.1@3279.29,2610 3290,2620.71 v3(3290,2785) ; C4.1@3279.39,2741.89 cw(c3253.79,2716.29) 3290,2716.29 cw(c3326.21,2716.29) C4.1@3300.61,2741.89 ; D1.1@3281.46,2618.54 ccw(c3260.86,2639.14) D1.1@3290,2639.14 ; 3290,2673.87 ccw(c3360.88,2673.87) D1.1@3310.76,2623.75 ; 4629.39,4920.61 ccw(c4655,4946.21) R9.2@4655,4910 ; R9.2@4660,4900 4650,4900 4600,4950 ; 5929.39,4920.61 ccw(c5955,4946.21) R10.2@5955,4910 ; R10.2@5960,4900 5950,4900 5900,4950 ; R12.2@7595,4900.21 ccw(c7526.68,4901.68) 7575,4950 ; R12.2@7610,4900 7610,4915 7575,4950 ; 8879.39,4920.61 ccw(c8905,4946.21) R11.2@8905,4910 ; R11.2@8910,4899.64 R11.2@8910,4900 8900,4900 8850,4950 7575,4950 ; 2960,4950 4167,4950 4600,4950 ; 4600,4950 5900,4950 ; 5900,4950 7103,4950 7575,4950
  Bottom Layer w15: v4@7054.7,4585.3 ccw(c7039.48,4600.52) 7061,4600.52 ; v4@7055.7,4899.7 cw(c7042.89,4886.89) 7061,4886.89 cw(c7079.11,4886.89) v4@7066.3,4899.7 ; v4(7060,4580) 7061,4581 v4(7061,4905) ; 7061,4595.69 ccw(c7075.69,4595.69) v4@7065.3,4585.3
  Bottom Layer w30: v3(1335,3755) 1335,3716.36 2486.36,2565 3235,2565 v3(3285,2615) ; 2892.26,2565 ccw(c2892.26,2689.74) v3@2980.46,2601.54 ; 2964.69,2565 ccw(c2964.69,2617.31) 3001.68,2580.32 ; 2966.32,2580.32 ccw(c3003.31,2617.31) 3003.31,2565 ; v3@2985,2596 3016.5,2564.5 ; v3@2987.54,2601.54 ccw(c3075.74,2689.74) 3075.74,2565 ; 3160,2565 3200,2605 3200,2695 v3(3290,2785) 3335,2740 3335,2590 3370,2555 3555,2555 3790,2790 3963.64,2790 4158.64,2595 4646.36,2595 4666.36,2615 5600,2615 5648,2663 5648,2889.92 5828.08,3070 6355,3070 6445,3160 v6(6445,3215)
  other v3: 2984,2598
pads on no net: PWR.3 QS1.1 QS1.8 QS2.1 QS2.8 QS3.1 QS3.8 QS4.1 QS4.8 QS5.1 QS5.8 QS6.1 QS6.8 U4.21 U4.22 U4.23 U4.24 U4.36 U4.37 U4.38 U4.39 U5.2 U5.3 U5.12 U5.13 U5.15 U6.2 U6.13 U6.14 U6.15 U7.3 U7.4 U7.5 U7.7 U7.8 U7.9 U7.10 U7.11 U7.12 U7.13 U7.18 U8.1 U8.2 U8.3 U8.6 U8.12 U8.13 U8.15 U8.22 U8.23 U8.36 U8.37 U8.38 U8.39 U8.40 U8.41 U8.42 U8.43 U8.44
copper on no net:
  other v1: 6939,4301

## Polygon pours and split planes (outlines as drawn)
GND on Top Layer "Top Layer-No Net" (hatched 45Degree grid 20 track 8, remove dead copper, pour order 2): 1020,2290 9710,2290 9710,5000 1020,5000
GND on Bottom Layer "Top Layer-No Net" (hatched 45Degree grid 20 track 8, remove dead copper, pour order 4): 1020,5000 1020,2290 9710,2290 9710,5000

## Keep-outs
Keep-Out Layer:
  the board outline again, w10

## Silkscreen, mask and mechanical layers (free items; w line width, h text height)
Top Overlay:
  text "v1" at 5843,2458 h98.43
  text "http:/" at 8500,2332 h118.11
  text "/blanboom.org" at 8695,2332 h118.11
  text "NixieClock" at 4918,2323 h255.91
Bottom Overlay:
  lines w5: 6927,3348.45 8980,3348.45
  text "by Blanboom" at 7526,3381 h137.8
  text "NixieClock" at 8976,3375 h393.7
  text "/blanboom.org" at 7417,3275 h97.64
  text "Version 1.0     2014 - 07    1abf8aa9     http:/" at 8975,3275 h97.64
  text "P01214303 P01214213 P01214124" at 2984,2315 h59.06
Mechanical 1:
  lines w10: 2849,2561 2849,2757
Mechanical 13:
  the board outline again, w10

## Text inside footprints (layer, text, board x,y; h text height)
C5: Top Overlay "+" at 3930,2935 h39.37 r90
C13: Top Overlay "+" at 1553,3448 h39.37 r270
D1: Top Overlay "+" at 3155,2670 h39.37 r270
D2: Top Overlay "+" at 6190,3155 h39.37 r90
D3: Top Overlay "+" at 1184,3513 h39.37 r270
JP1: Top Overlay "TX" at 9441.41,2875.67 h60; Top Overlay "RX" at 9443.38,2974.09 h60; Top Overlay "GND" at 9435.5,2773.31 h60; Top Overlay "+5V" at 9431.57,3078.43 h60
PWR: Top Overlay "+" at 1538,3156 h60; Top Overlay "-" at 1539,2794 h60; Top Overlay "DC 12V" at 1033,2694 h60
U2: Mechanical 1 "9" at 3648,2683 h50 r270
U7: Top Overlay "BLE" at 8835,3075 h60